# Altium PCB PCB1.PcbDoc
Units mil, origin at the board's own origin, x right, y up, seen from the top; angles counter-clockwise.
Board outline 6000 x 4000 mil, 2 copper layers (Top Layer, Bottom Layer); 133 components, 100 nets, 412 pads, 0 vias.
Unrouted connection lines stored in the file: 282.
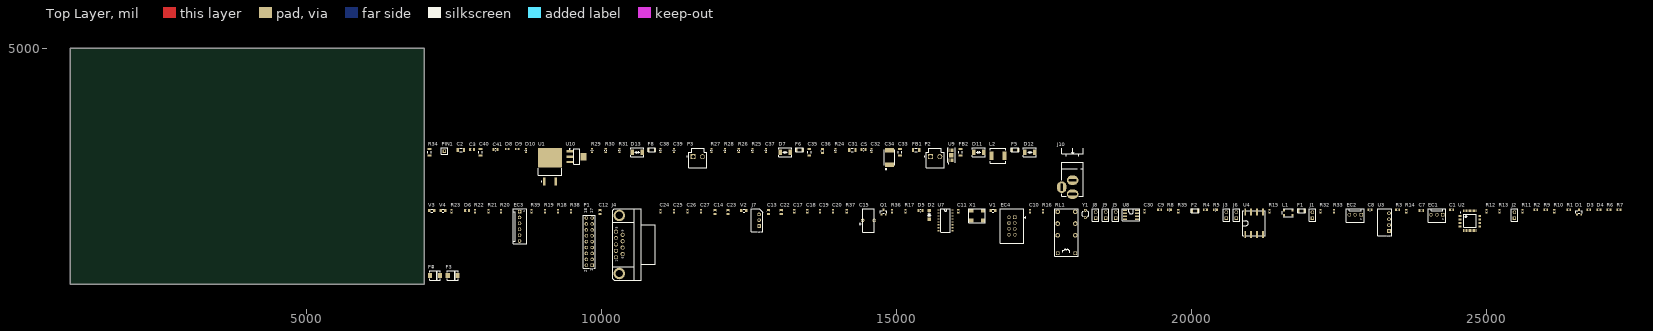
[diagram p0: Top Layer view]
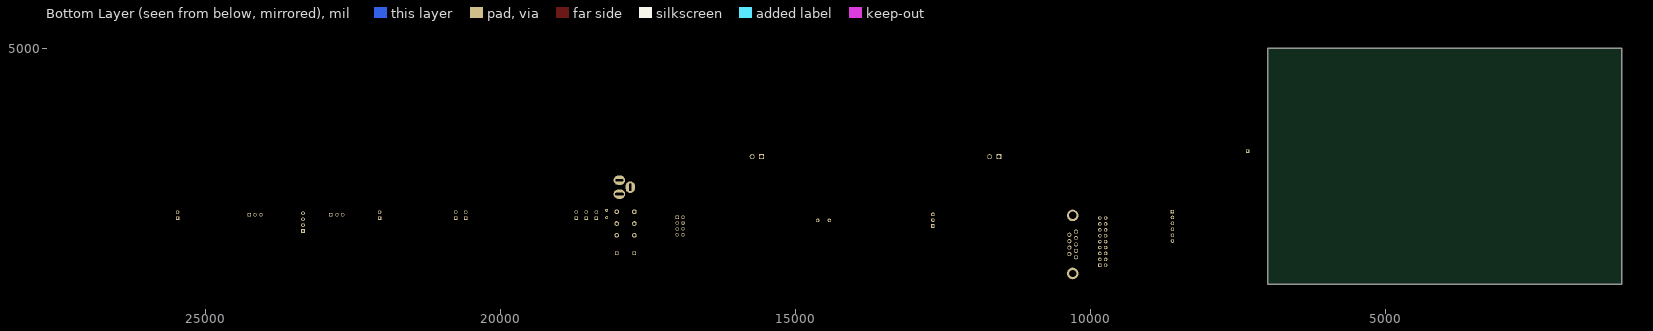
[diagram p1: Bottom Layer view, seen from below]

## Layer stack, top to bottom
Top Solder: solder mask 0.4, Solder Resist, Dk 3.5
Top Layer: signal copper 1.4
Dielectric 1: dielectric 12.6, FR-4, Dk 4.8
Bottom Layer: signal copper 1.4
Bottom Solder: solder mask 0.4, Solder Resist, Dk 3.5

## Board outline
1000,1000 7000,1000 7000,5000 1000,5000

## Design rules (kind name [scope] priority, off if disabled: settings)
Clearance [All] p1: gap=10 ignorepadtopadclearanceinfootprint=FALSE except(0: Arc-Hole Track-Hole SMDPad-Hole THPad-Hole Via-Hole Fill-Hole Poly-Hole Region-Hole Text-Hole)
PolygonConnect [All] p1: connectstyle=Relief reliefconductorwidth=10 reliefentries=4 polygonreliefangle="90 Angle" airgapwidth=10
RoomDefinition power [InComponentClass('power')] p1: confinementstyle=ConfineIn formatcopy=TRUE lockcomponents=FALSE outline 7045,2440 18185,2440 18185,3425 7045,3425
RoomDefinition micro [InComponentClass('micro')] p2: confinementstyle=ConfineIn formatcopy=TRUE lockcomponents=FALSE outline 7045,1060 27330,1060 27330,2395 7045,2395
RoutingVias [All] p1: holewidth=28 width=50 viastyle="Through Hole" minholewidth=28 minwidth=50 maxholewidth=28 maxwidth=50
SolderMaskExpansion [All] p1: expansion=4
Width [All] p1: maxlimit=10 minlimit=10 preferedwidth=10
30 further rules are at their usual default settings.

## Classes and differential pairs
net class EXT_CAN: +5VCAN GND_CAN NetEC1_2 NetEC1_3 NetJ2_1 NetL1_1 NetL1_4 NetR9_2
component class power: C2 C3 C5 C31 C32 C33 C34 C35 C36 C37 C38 C39 C40 C41 D7 D8 D9 D10 D11 D12 D13 F3 F4 F5 F6 F7 F8 FB1 FB2 J10 L2 P2 P3 PIN1 R24 R25 R26 R27 R28 R29 R30 R31 R34 U1 U9 U10
component class micro: C1 C7 C8 C9 C10 C11 C12 C13 C14 C15 C17 C18 C19 C20 C22 C23 C24 C25 C26 C27 C30 D1 D2 D3 D4 D5 D6 EC1 EC2 EC3 EC4 F1 F2 J1 J2 J3 J4 J5 J6 J7 J8 J9 L1 P1 Q1 R1 R2 R3 R4 R5 R6 R7 R8 R9 R10 R11 R12 R13 R14 R15 R16 R17 R18 R19 R20 R21 R22 R23 R32 R33 R35 R36 R37 R38 R39 RL1 U2 U3 U4 U7 U8 V1 V2 V3 V4 X1 Y1

## Components (designator, comment, footprint, x,y, rotation, side; value= is the part's Value field where it differs from the comment)
C1 "100nF" 0603 24415,2265 r0 top value=100pF
C2 "10 uF" 1206 7620,3280 r0 top value=100pF
C3 "10 uF" 0805 7805,3285 r0 top value=100pF
C5 "100 nF" 0805 14445,3285 r0 top value=100pF
C7 "10 uF" 0805 23900,2255 r0 top value=100pF
C8 "1 uF" 0603 23030,2265 r0 top value=100pF
C9 "10pF" 0603 19465,2265 r0 top value=100pF
C10 "10pF" 0603 17265,2240 r90 top value=100pF
C11 "100nF" 0603 16050,2240 r90 top value=100pF
C12 "100 nF" 0805 9980,2230 r90 top value=100pF
C13 "470nF" 0805 12830,2230 r90 top value=100pF
C14 "470nF" 0805 11925,2230 r90 top value=100pF
C15 "0,22F" EECS0HD224V 14430,2085 r0 top
C17 "100nF" 0603 13270,2240 r90 top value=100pF
C18 "100nF" 0603 13490,2240 r90 top value=100pF
C19 "100nF" 0603 13710,2240 r90 top value=100pF
C20 "100nF" 0603 13930,2240 r90 top value=100pF
C22 "470nF" 0805 13050,2230 r90 top value=100pF
C23 "470nF" 0805 12145,2230 r90 top value=100pF
C24 "10 nF" 0603 11000,2240 r90 top value=100pF
C25 "10 nF" 0603 11230,2240 r90 top value=100pF
C26 "10 nF" 0603 11460,2240 r90 top value=100pF
C27 "10 nF" 0603 11690,2240 r90 top value=100pF
C30 "100nF" 0603 19210,2240 r90 top value=100pF
C31 "10uF" 1206 14255,3280 r0 top value=100pF
C32 "100nF" 0603 14580,3270 r90 top value=100pF
C33 "10 uF" 1206 15065,3240 r90 top value=100pF
C34 "330uF" "CAPACITOR TYPE D" 14885,3150 r90 top value=100pF
C35 "10 uF" 1206 13525,3240 r90 top value=100pF
C36 "100 nF" 0805 13750,3260 r90 top value=100pF
C37 "100pF" 0603 12790,3270 r90 top
C38 "22nF" 0603 11005,3270 r90 top value=100pF
C39 "10pF" 0603 11235,3270 r90 top value=100pF
C40 "10 uF" 1206 7955,3240 r90 top value=100pF
C41 "10 uF" 0805 8205,3285 r0 top value=100pF
D1 "BAT54S" SOT23 26575,2225 r0 top
D2 "LL4148" SOD123 15560,2180 r90 top
D3 "LED_G" LED0603G 26740,2265 r0 top
D4 "LED_G" LED0603G 26910,2265 r0 top
D5 "BAT48" 0805 15410,2255 r0 top
D6 "BAT48" 0805 7720,2255 r0 top
D7 "SS26" SMB 13115,3240 r0 top
D8 "LED_G" LED0603G 8405,3295 r0 top
D9 "LED_G" LED0603G 8575,3295 r0 top
D10 "LED_G" LED0603G 8720,3270 r90 top
D11 "SS26" SMB 16395,3240 r0 top
D12 "SS26" SMB 17265,3240 r0 top
D13 "SS26" SMB 10610,3240 r0 top
EC1 "Conexcon-2545-2-03-1_1" CONEXCON-2545-2-03-1 24015,2055 r0 top
EC2 "Conexcon-2545-2-03-1_1" CONEXCON-2545-2-03-1 22630,2055 r0 top
EC3 "Conexcon-2545-2-06-1" CONEXCON-2545-2-06-1 8625,1985 r90 top
EC4 "JST_XAD_8" JST_XADSS_8 16960,1990 r90 top
F1 "1206L110" POLYFUSE_1206L 21870,2250 r0 top
F2 "1206L110" POLYFUSE_1206L 20065,2250 r0 top
F3 "TVS 12V Bidir" DO-214AA 7480,1150 r0 top
F4 "TVS 12V Bidir" DO-214AA 7180,1150 r0 top
F5 "1206L110" POLYFUSE_1206L 17015,3280 r0 top
F6 "1206L110" POLYFUSE_1206L 13360,3280 r0 top
F7 "TVS 12V Bidir" DO-214AA 7180,1150 r0 top
F8 "1206L110" POLYFUSE_1206L 10855,3280 r0 top
FB1 "ILHB1206ER121V" 1206 15335,3280 r0 top
FB2 "ILHB1206ER121V" 1206 16085,3240 r90 top
J1 "JUMPER2" JUMPER_2X1_2.54 22055,2175 r90 top
J2 "JUMPER2" JUMPER_2X1_2.54 25480,2175 r90 top
J3 "JUMPER2" JUMPER_2X1_2.54 20595,2175 r90 top
J4 "A-DS09A/KG-T2" FCI_D09P33E6RV09LF 10305,1185 r90 top
J5 "JUMPER2" JUMPER_2X1_2.54 18720,2175 r90 top
J6 "JUMPER2" JUMPER_2X1_2.54 20765,2175 r90 top
J7 "MKS_19023" MOLEX_MKS_19023 12675,1990 r90 top
J8 "JUMPER2" JUMPER_2X1_2.54 18380,2175 r90 top
J9 "JUMPER2" JUMPER_2X1_2.54 18550,2175 r90 top
J10 "PJ-002AH" POWER_JACK_5.5_2.1MM_NS_v1.1 17990,2530 r0 top
L1 "DLW43SH510XK2" 1812_DLW 21645,2215 r0 top
L2 "33 uH" ELL6SH 16725,3180 r0 top value=10mH
P1 "" HDR2X9 9845,1325 r90 top
P2 "B2P-VH(LF)(SN)" JST-B2P-VH(LF)(SN)_V 15660,3110 r0 top
P3 "B2P-VH(LF)(SN)" JST-B2P-VH(LF)(SN)_V 11635,3110 r0 top
PIN1 "Debug" PIN_Debug 7340,3260 r0 top
Q1 "BSS138-SOT23" "SOT23 - RJ" 14785,2225 r0 top
R1 "4K7" R0603 26400,2265 r0 top value=1K
R2 "330 OHM" R0603 25840,2265 r0 top value=1K
R3 "0 OHM" R0603 23500,2265 r0 top value=1K
R4 "0 OHM" R0603 20240,2265 r0 top value=1K
R5 "0 OHM" R0603 20410,2265 r0 top value=1K
R6 "330 OHM" R0603 27080,2265 r0 top value=1K
R7 "330 OHM" R0603 27250,2265 r0 top value=1K
R8 "0 OHM" R0603 19630,2265 r0 top value=1K
R9 "120 OHM" R0603 26010,2265 r0 top value=1K
R10 "120 OHM" R0603 26155,2240 r90 top value=1K
R11 "0 OHM" R0603 25615,2240 r90 top value=1K
R12 "120 OHM" R0603 25005,2240 r90 top value=1K
R13 "120 OHM" R0603 25225,2240 r90 top value=1K
R14 "0 OHM" R0603 23645,2240 r90 top value=1K
R15 "0 OHM" R0603 21330,2240 r90 top value=1K
R16 "10 K" R0603 17485,2240 r90 top value=1K
R17 "150 OHM" R0603 15155,2240 r90 top value=1K
R18 "100 K" R0603 9265,2240 r90 top value=1K
R19 "0 OHM" R0603 9045,2240 r90 top value=1K
R20 "33 OHM" R0603 8300,2240 r90 top value=1K
R21 "100 K" R0603 8090,2240 r90 top value=1K
R22 "33 OHM" R0603 7860,2240 r90 top value=1K
R23 "1 K" R0603 7460,2240 r90 top value=1K
R24 "4K7" R0603 13970,3270 r90 top value=1K
R25 "390 K" R0603 12560,3270 r90 top value=1K
R26 "47 K" R0603 12330,3270 r90 top value=1K
R27 "390 K" R0603 11865,3270 r90 top value=1K
R28 "10 K" R0603 12095,3270 r90 top value=1K
R29 "4K7" R0603 9845,3270 r90 top value=1K
R30 "1K2" R0603 10075,3270 r90 top value=1K
R31 "330 OHM" R0603 10305,3270 r90 top value=1K
R32 "2K2" R0603 22190,2240 r90 top value=1K
R33 "2K2" R0603 22420,2240 r90 top value=1K
R34 "0 OHM" R1206 7090,3240 r90 top value=1K
R35 "0 OHM" R0603 19780,2240 r90 top value=1K
R36 "33 OHM" R0603 14925,2240 r90 top value=1K
R37 "4K7" R0603 14160,2240 r90 top value=1K
R38 "33 OHM" R0603 9485,2240 r90 top value=1K
R39 "33 OHM" R0603 8815,2240 r90 top value=1K
RL1 "G5V-2-5VDC" RL-OMRON-G5V-2-5VDC 17885,1880 r90 top
U1 "MC7805" D2PAK 9130,2995 r90 top
U2 "STM32F072CBT7" STM-LQFP48_N_3d 24725,2080 r0 top
U3 "MUS-0505" MUS-0505 23280,2055 r90 top
U4 "ISO1050DU" DUB_R_PDSO_G8 21065,2035 r90 top
U7 "TI-MAX3232E" SOIC16 15835,2085 r0 top
U8 "M24C16" SO08 18980,2180 r0 top
U9 "TPS5401DGQ" MSOP10 15935,3190 r0 top
U10 "LM1117IMPX-3.3/NOPB" SOT223_ 9580,3165 r0 top
V1 "VC080526C580" VC080526C580 16640,2250 r0 top
V2 "VC080526C580" VC080526C580 12415,2250 r0 top
V3 "VC080526C580" VC080526C580 7125,2250 r0 top
V4 "VC080526C580" VC080526C580 7315,2250 r0 top
X1 "OSC_24MHZ" Oscillator_7x5 16370,2165 r0 top
Y1 "XTAL" R38 18205,2195 r0 top

## Footprints (in the part's own frame and the unit in brackets; to place one, negate y for a bottom-side part, rotate by r counter-clockwise, add the part's x,y. Pads: shape width x height; smd on the part's side, far side on the other; paste and mask are expansions set on the pad)
0603 [mm] "Chip Resistor, Body 1.6x0.8mm, IPC High Density"
  rect 0.7x0.9 smd: 1(-0.7,0) 2(0.7,0)
  silkscreen extent -0.05,-0.35 0.05,0.35, body extent -0.85,-0.47 0.85,0.47, height 0.6
0805 [mm] "Chip Resistor, Body 2.0x1.3mm, IPC High Density"
  rect 0.85x1.3 smd: 1(-0.85,0) 2(0.85,0)
  silkscreen extent -0.05,-0.55 0.05,0.55, body extent -1.1,-0.67 1.1,0.68, height 0.7
1206 [mm] "Chip Resistor, Body 3.2x1.6mm, IPC High Density"
  rect 0.95x1.7 smd: 1(-1.35,0) 2(1.35,0)
  silkscreen extent -0.5,-0.75 0.5,0.75, body extent -1.67,-0.87 1.67,0.87, height 0.75
1812_DLW [mm]
  rect 0.9x1 smd: 1(-1.9,1.1) 2(1.9,1.1) 3(1.9,-1.1) 4(-1.9,-1.1)
  silkscreen extent -2.8,-1.8 2.2,1.8, body extent -2.25,-1.6 2.25,1.6, height 2.61
"CAPACITOR TYPE D" [mm]
  rect 2x4 smd: 1(-3.15,0) 2(3.15,0)
  rect 1x1 on Mech3: PEGA(0,0)
  silkscreen extent -5.25,-2.3 3.3,2.3, body extent -3.7,-2.22 3.7,2.23, height 3
CONEXCON-2545-2-03-1 [mm]
  rect 1.5x1.5 hole 1: 1(6.35,3.2)
  round 1.5 hole 1: 2(3.81,3.2) 3(1.27,3.2)
  silkscreen extent 0,0 7.62,5.8, body extent 0,0 7.62,5.8, height 11.71
CONEXCON-2545-2-06-1 [mm]
  rect 1.5x1.5 hole 1: 1(6.35,0.3)
  round 1.5 hole 1: 2(3.81,0.3) 3(1.27,0.3) 4(-1.27,0.3) 5(-3.81,0.3) 6(-6.35,0.3)
  silkscreen extent -7.62,-2.9 7.62,2.9
D2PAK [mm] "DPAK, 3-Leads, Body 10.24x9.35mm, Pitch 2.54mm"
  rect 3.504x1.016 smd: 1(-6.313,2.54) 3(-6.313,-2.54)
  rect 8.38x10.49 smd: 4(3.9,0)
  silkscreen extent -6.44,-5.12 -0.69,5.12, body extent -6.11,-5.13 8.09,5.13, height 4.75
DO-214AA [mm] "DO-214-AA/SMB; 2 C-Bend Leads; Body 5.3 x 3.6 mm, inc. leads (LxW)"
  rect 1.8x2.3 smd: 1(-2.108,0) 2(2.108,0)
  silkscreen extent -2.35,-1.97 2.35,1.97, body extent -2.79,-1.97 2.79,1.97, height 2.65
DUB_R_PDSO_G8 [mm]
  rect 3x0.8 smd: 1(-4.8,3.81) 2(-4.8,1.27) 3(-4.8,-1.27) 4(-4.8,-3.81) 5(4.8,-3.81) 6(4.8,-1.27) 7(4.8,1.27) 8(4.8,3.81)
  silkscreen extent -5.35,-4.77 5.35,4.77, body extent -5.25,-4.75 5.25,4.75, height 4.18
EECS0HD224V [mm]
  round 1.5 hole 0.85: 1(0,0) 2(5,0)
  silkscreen extent -1.5,-5 5,5
ELL6SH [mm] "Precision Wire Wound Inductor, 2-Leads, Body 6,00x6,00mm, IPC Medium Density"
  rect 1.7x3.8 smd: 1(-2.85,0) 2(2.85,0)
  silkscreen extent -3.25,-3.25 3.25,3.25, body extent -3.25,-3.25 3.25,3.25, height 3
FCI_D09P33E6RV09LF [mil]
  round 70 hole 43.31: 1(274,56) 2(383,56) 3(492,56) 4(601,56) 5(710,56) 6(329,-56) 7(438,-56) 8(547,-56) 9(656,-56)
  round 196.85 hole 125.98: 10(0,0) 11(984,0)
  silkscreen extent -114,-610 1098,110, body extent -113,-620 1097,135, height 495
HDR2X9 [mm] "Connector; Header; 9x2 Position"
  rect 1.5x1.5 hole 0.9: 1(0,0)
  round 1.5 hole 0.9: 2(0,2.54) 3(2.54,0) 4(2.54,2.54) 5(5.08,0) 6(5.08,2.54) 7(7.62,0) 8(7.62,2.54) 9(10.16,0) 10(10.16,2.54) 11(12.7,0) 12(12.7,2.54) 13(15.24,0) 14(15.24,2.54) 15(17.78,0) 16(17.78,2.54) 17(20.32,0) 18(20.32,2.54)
  silkscreen extent -1.27,-1.27 21.59,3.81
JST-B2P-VH(LF)(SN)_V [mm] "THD, 2-Leads, Body 8.5x7.86mm, Pitch 3.96mm"
  rect 2.15x2.15 hole 1.65: 1(-1.98,1.4)
  round 2.15 hole 1.65: 2(1.98,1.4)
  silkscreen extent -4.7,-3.4 3.93,5.1, body extent -3.93,-3.2 3.93,5.3, height 10.9
JST_XADSS_8 [mm]
  rect 1.5x1.5 hole 1: 1(3.75,-1.25)
  round 1.5 hole 1: 2(3.75,1.25) 3(1.25,-1.25) 4(1.27,1.27) 5(-1.25,-1.25) 6(-1.25,1.25) 7(-3.75,-1.25) 8(-3.75,1.25)
  silkscreen extent -7.5,-5.87 7.5,5.05, body extent -7.5,-5.05 7.5,5.05, height 10.1
JUMPER_2X1_2.54 [mm]
  rect 1.5x1.5 hole 1: 1(-1.27,0)
  round 1.5 hole 1: 2(1.27,0)
  silkscreen extent -2.7,-1.4 2.7,1.4, body extent -2.54,-1.27 2.54,1.27, height 8.51
LED0603G [mm] "LED 0603 GREEN"
  rect 0.7x0.9 smd: 1(-0.7,0) 2(0.7,0)
  silkscreen extent -0.05,-0.35 0.05,0.35, body extent -0.8,-0.4 0.8,0.4, height 0.61
MOLEX_MKS_19023 [mm] "Connector_3x1_0.7mm"
  rect 1.6x1.6 hole 0.9: 1(0,0)
  round 1.6 hole 0.9: 2(2.5,0) 3(5,0)
  silkscreen extent -2.45,-1.52 7.45,3.38, body extent -2.5,-1.85 7.5,3.05, height 5.91
MSOP10 [mm]
  rect 0.3x1.45 smd: 1(-1,-2.2) 2(-0.5,-2.2) 3(0,-2.2) 4(0.5,-2.2) 5(1,-2.2) 6(1,2.2) 7(0.5,2.2) 8(0,2.2) 9(-0.5,2.2) 10(-1,2.2)
  rect 1.89x1.83 smd: 11(0,0)
  silkscreen extent -1.55,-3.61 1.55,3.13, body extent -1.55,-2.52 1.55,2.52, height 1.1
MUS-0505 [mm]
  rect 1.6x1.6 hole 1: 1(-3.81,-1.85)
  round 1.6 hole 1: 2(-1.27,-1.85) 3(1.27,-1.85) 4(3.81,-1.85)
  silkscreen extent -5.8,-3.05 5.8,3.05, body extent -5.75,-3.02 5.75,3.03, height 7.71
Oscillator_7x5 [mm]
  rect 1.8x1.6 smd: 1(-2.54,-2.1) 2(2.54,-2.1) 3(2.54,2.1) 4(-2.54,2.1)
  silkscreen extent -3.6,-3 3.6,3, body extent -3.5,-2.5 3.5,2.5, height 1.37
PIN_Debug [mm]
  rect 1.5x1.5 hole 1: 1(0,0)
  silkscreen extent -1.4,-1.4 1.4,1.4, body extent -1.27,-1.22 1.27,1.22, height 10.3
POLYFUSE_1206L [mm]
  rect 1x1.8 smd: 1(-1.4,0) 2(1.4,0)
  silkscreen extent -1.6,-0.83 1.6,0.83, body extent -1.6,-0.83 1.6,0.83, height 1.43
POWER_JACK_5.5_2.1MM_NS_v1.1 [mm]
  oval 5x4 hole 1 slot 3.7 at 0 deg: 1(0,0)
  oval 5x4 hole 1 slot 3.2 at 0 deg: 2(0,6)
  oval 4x5 hole 1 slot 3.2 at 90 deg: 3(-4.7,3)
  silkscreen extent -4.65,-0.85 4.65,19.85, body extent -4.9,-0.7 4.5,13.7, height 11.02
R38 [mm] "Crystal, Thru-Hole; 2 Leads; Body 3.1 x 8.2 mm (Dia.xH)"
  round 1.3 hole 0.7: 1(0,1.55) 2(0,-1.55)
  silkscreen extent -1.55,-1.19 1.55,1.17
R0603 [mm] "Chip Resistor, Body 1.6x0.8mm, IPC High Density"
  rect 0.7x0.9 smd: 1(-0.7,0) 2(0.7,0)
  silkscreen extent -0.05,-0.35 0.05,0.35, body extent -0.85,-0.47 0.85,0.47, height 0.6
R1206 [mm] "Chip Resistor, Body 3.2x1.6mm, IPC High Density"
  rect 0.95x1.7 smd: 1(-1.35,0) 2(1.35,0)
  silkscreen extent -0.5,-0.75 0.5,0.75, body extent -1.67,-0.87 1.67,0.87, height 0.75
RL-OMRON-G5V-2-5VDC [mm]
  rect 1.5x1.5 hole 1.1: 1(-8.85,3.81) 16(-8.85,-3.81)
  round 2 hole 1.1: 4(-1.23,3.81) 6(3.85,3.81) 8(8.93,3.81) 9(8.93,-3.81) 11(3.85,-3.81) 13(-1.23,-3.81)
  silkscreen extent -10.25,-5.05 10.25,5.05, body extent -10.2,-5 10.2,5, height 11.43
SMB [mm]
  rect 1.52x2.3 smd: 1(-2.135,0) 2(2.135,0)
  round 0.8 on Mech3: PEGA(0,0)
  silkscreen extent -2.8,-1.9 2.8,1.9, body extent -2.79,-1.97 2.79,1.97, height 2.65
SO08 [mil]
  rect 64x26 smd: 1(-102.5,75) 2(-102.5,25) 3(-102.5,-25) 4(-102.5,-75) 5(102.5,-75) 6(102.5,-25) 7(102.5,25) 8(102.5,75)
  silkscreen extent -150,-105 150,105, body extent -118,-96 118,96, height 69
SOD123 [mm]
  rect 1.4x1.4 smd: 1(-1.9,0) 2(1.9,0)
  rect 1x1 on Mech3: PEGA(0,0)
  silkscreen extent -0.89,-0.64 0.89,0.64, body extent -1.95,-0.9 1.95,0.9, height 1.18
SOIC16 [mm]
  rect 1x0.5 smd: 1(-3,4.445) 2(-3,3.175) 3(-3,1.905) 4(-3,0.635) 5(-3,-0.635) 6(-3,-1.905) 7(-3,-3.175) 8(-3,-4.445) 9(3,-4.445) 10(3,-3.175) 11(3,-1.905) 12(3,-0.635) 13(3,0.635) 14(3,1.905) 15(3,3.175) 16(3,4.445)
  silkscreen extent -2,-5 2,5, body extent -3,-4.95 3,4.95, height 1.4
SOT23 [mm]
  rect 0.8x1 smd: 1(-0.95,-1) 2(0.95,-1) 3(0,1)
  round 0.8 on Mech3: PEGA(-1.397,0) PEGA(1.397,0)
  silkscreen extent -1.4,-0.51 1.4,0.64, body extent -1.5,-1.25 1.5,1.25, height 1.11
"SOT23 - RJ" [mm]
  rect 0.8x1 smd: D(0,1) G(-0.95,-1) S(0.95,-1)
  round 0.8 on Mech3: PEGA(-1.397,0) PEGA(1.397,0)
  silkscreen extent -1.4,-0.51 1.4,0.64, body extent -1.5,-1.25 1.5,1.25, height 1.11
SOT223_ [mm] "SOT223, 4-Leads, Body 6.5x3.5mm, Pitch 2.3mm, Lead Span 7mm, IPC Low Density"
  rect 2.7x1 smd: 1(-2.95,2.3) 2(-2.95,0) 3(-2.95,-2.3)
  rect 2.7x3.3 smd: 4(2.95,0)
  silkscreen extent -3.07,-3.35 1.3,3.47, body extent -3.48,-3.25 3.48,3.25, height 1.65
STM-LQFP48_N_3d [mm] "QFP, 48-Leads, Body 7x7mm, Pitch 0.5mm, IPC Medium Density"
  rect 1.2x0.3 smd: 1(-4.25,2.75) 2(-4.25,2.25) 3(-4.25,1.75) 4(-4.25,1.25) 5(-4.25,0.75) 6(-4.25,0.25) 7(-4.25,-0.25) 8(-4.25,-0.75) 9(-4.25,-1.25) 10(-4.25,-1.75) 11(-4.25,-2.25) 12(-4.25,-2.75) 25(4.25,-2.75) 26(4.25,-2.25) 27(4.25,-1.75) 28(4.25,-1.25) 29(4.25,-0.75) 30(4.25,-0.25) 31(4.25,0.25) 32(4.25,0.75) 33(4.25,1.25) 34(4.25,1.75) 35(4.25,2.25) 36(4.25,2.75)
  rect 0.3x1.2 smd: 13(-2.75,-4.25) 14(-2.25,-4.25) 15(-1.75,-4.25) 16(-1.25,-4.25) 17(-0.75,-4.25) 18(-0.25,-4.25) 19(0.25,-4.25) 20(0.75,-4.25) 21(1.25,-4.25) 22(1.75,-4.25) 23(2.25,-4.25) 24(2.75,-4.25) 37(2.75,4.25) 38(2.25,4.25) 39(1.75,4.25) 40(1.25,4.25) 41(0.75,4.25) 42(0.25,4.25) 43(-0.25,4.25) 44(-0.75,4.25) 45(-1.25,4.25) 46(-1.75,4.25) 47(-2.25,4.25) 48(-2.75,4.25)
  silkscreen extent -4.17,-2.75 2.75,3.57, body extent -4.57,-4.57 4.57,4.57, height 1.62
VC080526C580 [mm] "Chip Capacitor, 2-Leads, Body 2,00x1,25mm, IPC Medium Density"
  rect 1.02x1.27 smd: 1(-1.02,0) 2(1.02,0)
  silkscreen extent -0.32,-0.63 0.32,0.63, body extent -1,-0.62 1,0.63, height 1.25

## Part data
C1 C11 C17 C18 C19 C20 C30 C32: library part 6003071, "Capacitor", Codigo=6003071, DescripcionArticulo="COND. CERAMICO SMD 0603 100 NF X7R 50V 10%", LatestRevisionDate=17-Jul-2002, LatestRevisionNote="Re-released for DXP Platform.", PackageDescription="Radial Cap, Thru-Hole; 2 Leads; 0.3 in Pin Spacing", PackageReference=RAD-0.3, Published=8-Jun-2000, Publisher="Altium Limited", tipo=condensador, valor=100nF
C2 C31 C33 C35 C40: library part 6003031, "Capacitor", Codigo=6003031, DescripcionArticulo="COND. CERAMICO SMD 1206 10 UF X5R 35V 10%", LatestRevisionDate=17-Jul-2002, LatestRevisionNote="Re-released for DXP Platform.", PackageDescription="Radial Cap, Thru-Hole; 2 Leads; 0.3 in Pin Spacing", PackageReference=RAD-0.3, Published=8-Jun-2000, Publisher="Altium Limited", tipo=condensador
  C2 C33 C35 C40: valor="10 uF"
  C31: valor=10uF
C3 C7 C41: library part 6003114, "Capacitor", Codigo=6003114, DescripcionArticulo="COND. CERAMICO SMD 0805 10 UF 6.3V -10V", LatestRevisionDate=17-Jul-2002, LatestRevisionNote="Re-released for DXP Platform.", PackageDescription="Radial Cap, Thru-Hole; 2 Leads; 0.3 in Pin Spacing", PackageReference=RAD-0.3, Published=8-Jun-2000, Publisher="Altium Limited", tipo=condensador, valor="10 uF"
C5 C12 C36: library part 6003010, "Capacitor", Codigo=6003010, DescripcionArticulo="COND. CERAMICO SMD 0805 100 NF 50V 10%", LatestRevisionDate=17-Jul-2002, LatestRevisionNote="Re-released for DXP Platform.", PackageDescription="Radial Cap, Thru-Hole; 2 Leads; 0.3 in Pin Spacing", PackageReference=RAD-0.3, Published=8-Jun-2000, Publisher="Altium Limited", tipo=condensador, valor="100 nF"
C8: library part 6003088, "Capacitor", Codigo=6003088, DescripcionArticulo="COND. CERAMICO SMD 0603 1 UF X5R 10V 10%", LatestRevisionDate=17-Jul-2002, LatestRevisionNote="Re-released for DXP Platform.", PackageDescription="Radial Cap, Thru-Hole; 2 Leads; 0.3 in Pin Spacing", PackageReference=RAD-0.3, Published=8-Jun-2000, Publisher="Altium Limited", tipo=condensador, valor="1 uF"
C9 C10 C39: library part 6003068, "Capacitor", Codigo=6003068, DescripcionArticulo="COND. CERAMICO SMD 0603 10 PF X7R 50V", LatestRevisionDate=17-Jul-2002, LatestRevisionNote="Re-released for DXP Platform.", PackageDescription="Radial Cap, Thru-Hole; 2 Leads; 0.3 in Pin Spacing", PackageReference=RAD-0.3, Published=8-Jun-2000, Publisher="Altium Limited", tipo=condensador, valor=10pF
C13 C14 C22 C23: library part 6003055, "Capacitor", Codigo=6003055, DescripcionArticulo="COND. CERAMICO SMD 0805 470NF X7R 50V 10%", LatestRevisionDate=17-Jul-2002, LatestRevisionNote="Re-released for DXP Platform.", PackageDescription="Radial Cap, Thru-Hole; 2 Leads; 0.3 in Pin Spacing", PackageReference=RAD-0.3, Published=8-Jun-2000, Publisher="Altium Limited", tipo=condensador, valor=470nF
C15: library part 3023047, "Polarized Capacitor (Axial)", Codigo=3023047, DescripcionArticulo="CONDENSADOR EECS0HD224V 0,22F 5,5 V", LatestRevisionDate=17-Jul-2002, LatestRevisionNote="Re-released for DXP Platform.", PackageDescription="Polarized Capacitor; 2 Leads", PackageReference=POLAR0.8, Published=8-Jun-2000, Publisher="Altium Limited", tipo=condensador, valor=0,22F
C24 C25 C26 C27: library part 6003067, "Capacitor", Codigo=6003067, DescripcionArticulo="COND. CERAMICO SMD 0603 10 NF X7R 50V 10%", LatestRevisionDate=17-Jul-2002, LatestRevisionNote="Re-released for DXP Platform.", PackageDescription="Radial Cap, Thru-Hole; 2 Leads; 0.3 in Pin Spacing", PackageReference=RAD-0.3, Published=8-Jun-2000, Publisher="Altium Limited", tipo=condensador, valor="10 nF"
C34: library part 6010017, "Polarized Capacitor (Axial)", Codigo=6010017, DescripcionArticulo="COND. ELEC. SMD 330 UF 6.3V CAJA D", LatestRevisionDate=17-Jul-2002, LatestRevisionNote="Re-released for DXP Platform.", PackageDescription="Polarized Capacitor; 2 Leads", PackageReference=POLAR0.8, Published=8-Jun-2000, Publisher="Altium Limited", tipo=condensador, valor=330uF
C37: library part 6003092, "Capacitor", Codigo=6003092, DescripcionArticulo="COND. CERAMICO SMD 0603 100 PF X5R 50V 10%", LatestRevisionDate=17-Jul-2002, LatestRevisionNote="Re-released for DXP Platform.", PackageDescription="Radial Cap, Thru-Hole; 2 Leads; 0.3 in Pin Spacing", PackageReference=RAD-0.3, Published=8-Jun-2000, Publisher="Altium Limited", tipo=condensador, valor=100pF
C38: library part 6003126, "Capacitor", Codigo=6003126, DescripcionArticulo="COND. CERAMICO SMD 0603 22NF 10% 50V X5R", LatestRevisionDate=17-Jul-2002, LatestRevisionNote="Re-released for DXP Platform.", PackageDescription="Radial Cap, Thru-Hole; 2 Leads; 0.3 in Pin Spacing", PackageReference=RAD-0.3, Published=8-Jun-2000, Publisher="Altium Limited", tipo=condensador, valor=22nF
D1: library part 6006051, "High Current Density Surface Mount Schottky Rectifier", Codigo=6006051, DescripcionArticulo="DIODO SMD BAT54S Schottky 30V,200mA VISHAY", Escandallo=Sí, tipo=diodo, valor=BAT54S
D2: library part LL4148_(06006001), "DIODE SWITCH,100V,150MA,SOD123", Sallen Ref=06006001
D3 D4 D8 D9 D10: library part 6006022, "Typical RED, GREEN, YELLOW, AMBER GaAs LED", Codigo=6006022, DescripcionArticulo="DIODO LED VERDE SML-LX0603GW 1.6X0.8X0.6", Escandallo=Sí, LatestRevisionDate=17-Jul-2002, LatestRevisionNote="Re-released for DXP Platform.", PackageDescription="SM LED; 2 Flat Leads", PackageReference=3.2X1.6X1.1, PackageVersion=Feb-2002, Published=8-Jun-2000, Publisher="Altium Limited", tipo=diodo, valor=LED_G
D5 D6: library part 6006002, "Schottky Diode", Code_JEDEC=DO-214-AA, Codigo=6006002, DescripcionArticulo="DIODO SMD TMMBAT48 SCHORTKY", Escandallo=Sí, LatestRevisionDate=17-Jul-2002, LatestRevisionNote="Re-released for DXP Platform.", PackageDescription="DO-214-AA/SMB; 2 C-Bend Leads; Body 5.3 x 3.6 mm, inc. leads (LxW)", PackageReference=SMB, Published=8-Jun-2000, Publisher="Altium Limited", tipo=diodo, valor=BAT48
D7 D11 D12 D13: library part 6006033, "Schottky Diode", Code_JEDEC=DO-214-AA, Codigo=6006033, Descripcion2Articulo=/ONsemi/Vishay/Farchild/TaiwanS, DescripcionArticulo="DIODO SS26 SCHOTTKY CASE: SMB  2AMP 60V", Escandallo=Sí, LatestRevisionDate=17-Jul-2002, LatestRevisionNote="Re-released for DXP Platform.", PackageDescription="DO-214-AA/SMB; 2 C-Bend Leads; Body 5.3 x 3.6 mm, inc. leads (LxW)", PackageReference=SMB, Published=8-Jun-2000, Publisher="Altium Limited", tipo=diodo, valor=SS26
EC1 EC2: library part 5100106, "2.54mm pitch Terminal Block 3P", Part Number=Conexcon-2545-2-03-1, Codigo=5100106, DescripcionArticulo="CON.RECTO MACHO 3P SERIE 2545 PASO 2.54", Escandallo=Sí, Sallen Ref=05100106, tipo=conector, valor=RECTO3P
EC3: library part 5100107, "2.54mm pitch Terminal Block 6P", Codigo=5100107, DescripcionArticulo="CON.RECTO MACHO 6P SERIE 2545 PASO 2.54", Escandallo=Sí, Part Number=Conexcon-2545-2-06-1, Sallen Ref=05100107, tipo=conector, valor=RECTO6P
EC4: library part Conn_JST_XADSS_8_vias, "Conector 8(2x4) vias (3A)", Part Number=-, Sallen Ref=05100217
F1 F2 F5 F6 F8: library part POLYFUSE_1206L050/24
F3 F4 F7: library part SMBJ12CA, "TVS 12V 600W Bidir SMD", Fabricante=Littelfuse, Montaje=-, Referencia=SMBJ12CA
FB1 FB2: library part 4039004, "Chip Ferrite Bead for Power Lines, 33 Ohm, 6000 mA, , -55 to 125 degC, 3.2 x 1.6 x 1.3 mm SMD, Tape and Reel", Codigo=4039004, DescripcionArticulo="FERRITA ILHB1206ER121V 6A-0.02", Escandallo=Sí, tipo=ferrita, valor=ILHB1206ER121V
J1 J2 J3 J5 J6 J8 J9: library part 5190140, "Jumper 2pin P=2.54mm", Part Number=-, Codigo=5190140, DescripcionArticulo="JUMPER PARA POSTE AISLADO- PASO: 2.54MM (CO 3005)", Escandallo=Sí, Sallen Ref=05190140, tipo=conector, valor=JMP
J4: library part 5110018, "DB9 CONN RIGHT ANGLE", Part Number="ASSMANN A-DS09A/KG-T2", Part Number Aux="FCI D09P33E6RV09LF", ATLStockNo1=4500.xxxx, Codigo=5110018, DescripcionArticulo="CONEC. DB9  ACOD.  C.I REF: CO 2359 M", Escandallo=Sí, Sallen Ref=05110018, tipo=conector, valor=A-DS09A/KG-T2_FCI
J7: library part 5100079, "Molex_MKS_19023", Codigo=5100079, DescripcionArticulo="CONEC.MACHO 3P STOCKO MKS19023", Escandallo=Sí, Sallen Ref=05100079, valor=MOLEX_MKS_19023
J10: library part PJ-002AH_v1.1, "CONN PWR JACK 2.1X5.5MM HIGH CUR", Color=Black, Current Rating=5A, Manufacturer="CUI Inc", Operating Temperature="-25°C ~ 85°C", Supplier Part Number=CP-002AH-ND, Voltage - Rated=24VDC, .Checked PCB=MM, .Checked SCH=MM, .Creator=MM, Category="Connectors, Interconnects", ComponentLink1Description=http://products.cui.com/GetSpecForDigiKey.aspx?MFGNum=PJ-002AH, ComponentLink1URL=http://products.cui.com/GetSpecForDigiKey.aspx?MFGNum=PJ-002AH, Connector Type=Jack, Contact Material="Copper Alloy", Contact Material - Plating=Nickel, Family="Barrel - Power", Features=-, Gender=Male, Housing Color=Black, Housing Material=Thermoplastic, Internal Switch(s)="Single Switch, Normally Closed", Manufacturer Part Number=PJ-002AH, Mating connector="2.1mm ID, 5.5mm OD", Mounting Type="Through Hole, Right Angle", Number of Positions/Contacts="2 Conductors, 3 Contacts", Plug/Mating Plug Diameter="2.1mm ID, 5.5mm OD", Price 1k [$]=0.23625, Pricing 1="1=1.01, 10=0.704, 100=0.4724, 500=0.3819, 1000=0.3417, 2500=0.27135 (USD)", RoHS="RoHS Compliant", Shielding=Unshielded, Stock 1=138933, Supplier=Digikey, Supplier 1=Digi-Key, Supplier Part Number 1=CP-002AH-ND, Termination="Solder Eyelet(s)"
L1: library part 6012027, "Bobina Common mode 51uH 230mA 1.0Ohm SMD 1812 /Murata", Codigo=6012027, Descripcion2Articulo="DLW43SH510XK2L MURATA", DescripcionArticulo="DLW43SH510XK2L SMD Common Mode Choke 1812", Escandallo=Sí, Mfg1_PN=DLW43SH510XK2, Mfg2=Murata, Sallen Ref=06012027, tipo=bobina, valor=DLW43SH510XK2L
L2: library part 6012028, "Magnetic-Core Inductor", Codigo=6012028, DescripcionArticulo="INDUCTOR 33UH 0.6A 6x6mm ELL6SH330M", Escandallo=Sí, LatestRevisionDate=17-Jul-2002, LatestRevisionNote="Re-released for DXP Platform.", PackageDescription="Axial Device, Thru-Hole; 2 Leads; 0.9 in Pin Spacing", PackageReference=AXIAL-0.9, Published=24-Mar-1999, Publisher="Altium Limited", tipo=bobina, valor="33 uH"
P1: library part "Header 9X2", "Header, 9-Pin, Dual row", LatestRevisionDate=17-Jul-2002, LatestRevisionNote="Re-released for DXP Platform.", Publisher="Altium Limited"
P2 P3: library part 5110017, "Male Header, Pitch 3.96 mm, 1 x 2 Position, Height 10.9 mm, Tail Length 3.7 mm, -25 to 85 degC, RoHS, Bulk", Capacitance="27 pF", Case/Package=0603, Case Code (Metric)=1608, Max Operating Temperature=125degC, Min Operating Temperature=-55degC, Package Quantity=4000, Resistance="100000000000 Ohm", Tolerance=5%, Type (Capacitors)=C0G, Voltage Rating="50 V", Case Code (Imperial)=0603, Codigo=5110017, ComponentLink1Description="Manufacturer URL", ComponentLink1URL=http://www.jst.com/home2.html, ComponentLink2Description=Datasheet, ComponentLink2URL=http://www.jst-mfg.com/product/pdf/eng/eVH.pdf, DatasheetVersion=May-16, DescripcionArticulo="CONEC. MACHO RECTO 2 VIA C.I PASO 3,96MM", Escandallo=Sí, Height="0.8 mm", Length="1.6 mm", Mount="Surface Mount", PackageDescription="Male Header, Pitch 3.96 mm, 1 x 2 Position, Height 10.9 mm, Tail Length 3.7 mm", PackageReference=B2P-VH(LF)(SN), Packaging="Tape and Reel", Pins=2, Radiation Hardening=No, REACH SVHC="No SVHC", RoHSCompliant=True, tipo=conector, valor=B2P-VH(LF)(SN), Voltage Rating (DC)="50 V", Width="0.8 mm"
PIN1: library part Pin_Debug, "PIN DE NET PUNTUAL /Pin Strip", Sallen Ref=05190126
Q1: "N-Channel Logic Level Enhancement Mode Field Effect Transistor", Part Number=BSS138-SOT23, Sallen Ref=06004021
R1 R24 R29 R37: library part 6005096, "Resistor", Codigo=6005096, DescripcionArticulo="RESISTENCIA SMD 0603 4K7, 1% 0.1W", LatestRevisionDate=17-Jul-2002, LatestRevisionNote="Re-released for DXP Platform.", PackageDescription="Axial Device, Thru-Hole; 2 Leads; 0.3 in Pin Spacing", PackageReference=AXIAL-0.3, Published=8-Jun-2000, Publisher="Altium Limited", tipo=resistencia, valor=4K7
R2 R6 R7 R31: library part 6005080, "Resistor", Codigo=6005080, DescripcionArticulo="RESISTENCIA SMD 0603 330 OHM, 1% 0.1W", LatestRevisionDate=17-Jul-2002, LatestRevisionNote="Re-released for DXP Platform.", PackageDescription="Axial Device, Thru-Hole; 2 Leads; 0.3 in Pin Spacing", PackageReference=AXIAL-0.3, Published=8-Jun-2000, Publisher="Altium Limited", tipo=resistencia, valor="330 OHM"
R3 R4 R5 R8 R11 R14 R15 R19 R35: library part 6005124, "Resistor", Codigo=6005124, DescripcionArticulo="RESISTENCIA SMD 0603 0 OHM, 1% 0.1W", LatestRevisionDate=17-Jul-2002, LatestRevisionNote="Re-released for DXP Platform.", PackageDescription="Axial Device, Thru-Hole; 2 Leads; 0.3 in Pin Spacing", PackageReference=AXIAL-0.3, Published=8-Jun-2000, Publisher="Altium Limited", tipo=resistencia, valor="0 OHM"
R9 R10 R12 R13: library part 6005086, "Resistor", Codigo=6005086, DescripcionArticulo="RESISTENCIA SMD 0603 120 OHM, 1% 0.1W", LatestRevisionDate=17-Jul-2002, LatestRevisionNote="Re-released for DXP Platform.", PackageDescription="Axial Device, Thru-Hole; 2 Leads; 0.3 in Pin Spacing", PackageReference=AXIAL-0.3, Published=8-Jun-2000, Publisher="Altium Limited", tipo=resistencia, valor="120 OHM"
R16 R28: library part 6005102, "Resistor", Codigo=6005102, DescripcionArticulo="RESISTENCIA SMD 0603 10 K, 1%", LatestRevisionDate=17-Jul-2002, LatestRevisionNote="Re-released for DXP Platform.", PackageDescription="Axial Device, Thru-Hole; 2 Leads; 0.3 in Pin Spacing", PackageReference=AXIAL-0.3, Published=8-Jun-2000, Publisher="Altium Limited", tipo=resistencia, valor="10 K"
R17: library part 6005087, "Resistor", Codigo=6005087, DescripcionArticulo="RESISTENCIA SMD 0603 150 OHM, 1% 0.1W", LatestRevisionDate=17-Jul-2002, LatestRevisionNote="Re-released for DXP Platform.", PackageDescription="Axial Device, Thru-Hole; 2 Leads; 0.3 in Pin Spacing", PackageReference=AXIAL-0.3, Published=8-Jun-2000, Publisher="Altium Limited", tipo=resistencia, valor="150 OHM"
R18 R21: library part 6005075, "Resistor", Codigo=6005075, DescripcionArticulo="RESISTENCIA SMD 0603 100 K, 1%", LatestRevisionDate=17-Jul-2002, LatestRevisionNote="Re-released for DXP Platform.", PackageDescription="Axial Device, Thru-Hole; 2 Leads; 0.3 in Pin Spacing", PackageReference=AXIAL-0.3, Published=8-Jun-2000, Publisher="Altium Limited", tipo=resistencia, valor="100 K"
R20 R22 R36 R38 R39: library part 6005074, "Resistor", Codigo=6005074, DescripcionArticulo="RESISTENCIA SMD 0603 33 OHM, 1% 0.1W", LatestRevisionDate=17-Jul-2002, LatestRevisionNote="Re-released for DXP Platform.", PackageDescription="Axial Device, Thru-Hole; 2 Leads; 0.3 in Pin Spacing", PackageReference=AXIAL-0.3, Published=8-Jun-2000, Publisher="Altium Limited", tipo=resistencia, valor="33 OHM"
R23: library part 6005111, "Resistor", Codigo=6005111, DescripcionArticulo="RESISTENCIA SMD 0603 1 K, 1% 0.1W", LatestRevisionDate=17-Jul-2002, LatestRevisionNote="Re-released for DXP Platform.", PackageDescription="Axial Device, Thru-Hole; 2 Leads; 0.3 in Pin Spacing", PackageReference=AXIAL-0.3, Published=8-Jun-2000, Publisher="Altium Limited", tipo=resistencia, valor="1 K"
R25 R27: library part 6005091, "Resistor", Codigo=6005091, DescripcionArticulo="RESISTENCIA SMD 0603 390 K, 1%", LatestRevisionDate=17-Jul-2002, LatestRevisionNote="Re-released for DXP Platform.", PackageDescription="Axial Device, Thru-Hole; 2 Leads; 0.3 in Pin Spacing", PackageReference=AXIAL-0.3, Published=8-Jun-2000, Publisher="Altium Limited", tipo=resistencia, valor="390 K"
R26: library part 6005077, "Resistor", Codigo=6005077, DescripcionArticulo="RESISTENCIA SMD 0603 47 K, 1% 0.1W", LatestRevisionDate=17-Jul-2002, LatestRevisionNote="Re-released for DXP Platform.", PackageDescription="Axial Device, Thru-Hole; 2 Leads; 0.3 in Pin Spacing", PackageReference=AXIAL-0.3, Published=8-Jun-2000, Publisher="Altium Limited", tipo=resistencia, valor="47 K"
R30: library part 6005113, "Resistor", Codigo=6005113, DescripcionArticulo="RESISTENCIA SMD 0603 1K2, 1%  0.1W", LatestRevisionDate=17-Jul-2002, LatestRevisionNote="Re-released for DXP Platform.", PackageDescription="Axial Device, Thru-Hole; 2 Leads; 0.3 in Pin Spacing", PackageReference=AXIAL-0.3, Published=8-Jun-2000, Publisher="Altium Limited", tipo=resistencia, valor=1K2
R32 R33: library part 6005073, "Resistor", Codigo=6005073, DescripcionArticulo="RESISTENCIA SMD 0603 2K2, 1% 0.1W", LatestRevisionDate=17-Jul-2002, LatestRevisionNote="Re-released for DXP Platform.", PackageDescription="Axial Device, Thru-Hole; 2 Leads; 0.3 in Pin Spacing", PackageReference=AXIAL-0.3, Published=8-Jun-2000, Publisher="Altium Limited", tipo=resistencia, valor=2K2
R34: library part 6005142, "Resistor", Codigo=6005142, DescripcionArticulo="RESISTENCIA SMD 1206 0 OHM, 1%", LatestRevisionDate=17-Jul-2002, LatestRevisionNote="Re-released for DXP Platform.", PackageDescription="Axial Device, Thru-Hole; 2 Leads; 0.3 in Pin Spacing", PackageReference=AXIAL-0.3, Published=8-Jun-2000, Publisher="Altium Limited", tipo=resistencia, valor="0 OHM"
RL1: "Omrom Relay G5V-2-5VDC", Sallen Ref=05032015
U1: library part 6004008, Codigo=6004008, DescripcionArticulo="TRANSISTOR SMD MC78M05CDTRK", Escandallo=Sí
U2: library part 4021038, Codigo=4021038, DescripcionArticulo="MICRO STM32F072CBT7 LQFP48", Escandallo=Sí, tipo=integrado, valor=STM32F072CBT7
U3: library part 4007001, "Convertidor DC/DC isolated 1W 5v/5v 1.8E DANUBE (eQ XpPower IE0505S)", Part Number=-, Codigo=4007001, DescripcionArticulo="CONVERTIDOR DC/DC 1W 5V/12V 1.8 MUS-0512", Escandallo=Sí, Sallen Ref=04007002, tipo=integrado, valor=MUS-0505
U4: library part 6001176, "CAN Transceiver Isolated 3-5vcc (-55º-105ºC)SOP8-DIP", Part Number=-, Codigo=6001176, DescripcionArticulo="CAN TRANSCEIVER ISO1050DU SOP8-DIP", Escandallo=Sí, Sallen Ref=06001176, tipo=integrado, valor=ISO1050DU
U7: library part 6001091, Codigo=6001091, DescripcionArticulo="CIRCUITO INTEGRADO SMD MAX3232CSE", Escandallo=Sí, tipo=integrado, valor=MAX3232
U8: library part 6001076, Codigo=6001076, DescripcionArticulo="CIRCUITO INTEGRADO SMD M24C16 WMN6TP SOIC8P", Escandallo=Sí, valor=M24C16
U9: library part 6001170, "Buck Step Down Regulator with 3.5 to 42 V Input and 0.8 to 39 V Output, -40 to 150 degC, 10-Pin MSOP-PowerPAD (DGQ), Green (RoHS & no Sb/Br)", Manufacturer="Texas Instruments", Rating=Catalog, Switch Current Limit(Typ)(A)=0.94, Code_JEDEC=MO-187-BA-T, Codigo=6001170, ComponentLink1Description=Datasheet, ComponentLink1URL=http://www.ti.com/general/docs/lit/getliterature.tsp?genericPartNumber=TPS5401&fileType=pdf, ComponentLink2Description="Package Specification", ComponentLink2URL=http://www.ti.com/lit/ml/mpds043e/mpds043e.pdf, ComponentLink3Description="URL Link1", ComponentLink3URL="Samples URL:http://www.ti.com/product/tps5401#samples", DatasheetVersion=SLVSAB0, DescripcionArticulo="IC ROHS SMD TPS5401DGQ", Duty Cycle(Max)(%)=98, Eco-Plan="Green (RoHS & no Sb/Br)", Escandallo=Sí, Iout(Max)(A)=0.5, Iq(Typ)(mA)=0.116, Mounting Technology="Surface Mount", PackageDescription="10-Pin PowerPAD Plastic Small Outline 0.5 mm Pitch, Exposed Pad", PackageReference=DGQ0010D, PackageVersion="revF, Nov-2011", PartNumber=TPS5401DGQ, Regulated Outputs(#)=1, SubFamily="Step-Down Regulator", tipo=integrado, Topology=Buck, valor=TPS5401DGQ, Vin(Max)(V)=42, Vin(Min)(V)=3.5, Vout(Max)(V)=39, Vout(Min)(V)=0.8
U10: library part 6001155, "800mA Low-Dropout Linear Regulator, 4-pin SOT-223, Pb-Free", Manufacturer="National Semiconductor", PackageTopMarking=XYTT*N05B, PowerWise=N, Code_IPC=SOT223-4, Code_JEDEC=TO-261-AA, Codigo=6001155, ComponentLink1Description="Manufacturer URL", ComponentLink1URL=http://www.national.com/, ComponentLink2Description="LM1117 Datasheet", ComponentLink2URL=http://www.national.com/ds/LM/LM1117.pdf, ComponentLink3Description="LM1117 Web Page", ComponentLink3URL=http://www.national.com/pf/LM/LM1117.html, ComponentLink4Description="MP04A Package Page", ComponentLink4URL=http://www.national.com/packaging/folders/mp04a.html, CompType="LDO IC", DatasheetVersion=Apr-2006, Descripcion2Articulo="Case Style:SOT-223", DescripcionArticulo="IC SMD  LM1117IMP-3.3/NOPB - V REG, LINEAR, 3.3V", Escandallo=Sí, High-Reliability=Y, PackageDescription="Molded SOT-223, 6.50 x 3.56 x 1.6mm Body, 4 Lead, 2.3mm Pitch", PackageReference=MP04A, PackageVersion="revB, Apr-2003", PartNumber=LM1117IMPX-3.3/NOPB, PinCount=4, RevisionNote="SCH symbol layout adjusted", RoHS=Y, tipo=integrado, valor=LM1117IMPX-3.3/NOPB
V1 V2 V3 V4: "Varistor (Voltage-Sensitive Resistor)"
X1: library part OSC7X5_4P3.3-24MHZ, "Oscillator 7x5mm 24Mhz 3.3v 4p s73305T-24 //Aker-usa", Part Number=-, Codigo=04027021, Part Type=Oscillator, Sallen Ref=04027021
Y1: "Crystal Oscillator", LatestRevisionDate=17-Jul-2002, LatestRevisionNote="Re-released for DXP Platform.", PackageDescription="Crystal, Thru-Hole; 2 Leads; Body 3.1 x 8.2 mm (Dia.xH)", PackageReference=R38, Published=8-Jun-2000, Publisher="Altium Limited"

## Nets (pads, with @x,y where several pads share a name; then routed paths per layer and width w, separated by ;. In a path a pad name is that pad's centre, name@x,y a point inside that pad or via, vN(x,y) a via of type N, cw(c..) or ccw(c..) an arc to the next point about the centre after c; other vN are vias at no path point)
3V3: C8.1 C12.1 C17.2 C18.2 C19.2 C20.2 C24.2 C25.2 C26.2 C27.2 C30.2 C41.2 D1.2 J5.1 P1.2 R1.2 R6.2 R7.2 R17.1 R18.2 R19.1 R21.2 R30.2 R32.1 R33.1 U2.9 U2.24 U2.36 U2.48 U4.1 U7.16 U8.8 U10.2 U10.4 X1.4
5V: C3.2 C40.2 P1.4 R31.2 U1.3 U3.2 U10.3
12V: D11.1 FB2.2
12V_F: C33.2 C34.1 FB2.1 L2.2 R24.2
+5V: D2.2 RL1.1
+5VCAN: C7.1 U3.4 U4.8
+12V: C2.2 C5.2 C31.1 D11.2 D12.2 D13.2 F2.2 U1.1
+24V: F1.2 F6.2 FB1.1
CAN_RX: U2.32 U4.2
CAN_TX: U2.33 U4.3
GND: C1.1 C2.1 C3.1 C5.1 C8.2 C9.1 C10.1 C11.1 C12.2 C14.1 C15.2 C17.1 C18.1 C19.1 C20.1 C23.2 C24.1 C25.1 C26.1 C27.1 C30.1 C31.2 C33.1 C34.2 C35.1 C36.1 C37.1 C38.1 C39.1 C40.1 C41.1 D1.1 D7.1 D8.2 D9.2 D10.2 EC3.3 EC4.8 F3.1 F4.1 F7.1 J4.5 J7.3 J9.2 J10.2 P1.6 P1.14 P1.16 P2.1 P3.1 PIN1.1 Q1.S R16.1 R25.1 R28.1 R34.2 R35.1 R37.1 U1.4 U2.8 U2.23 U2.35 U2.47 U3.1 U4.4 U7.15 U8.4 U8.7 U9.9 U9.11 U10.1 V2.1 X1.2
GND_CAN: C7.2 EC1.1 EC2.1 U3.3 U4.5
GND_EARTH: J4.10 J4.11 R34.1 V2.2 V3.1 V4.1
I2C1_SCL: R32.2 U2.45 U8.6
I2C1_SDA: R33.2 U2.46 U8.5
LED_0: D3.2 U2.18
LED_1: D4.2 U2.19
LOCK_RELAY: R36.2 U2.16
LOCK_SWITCH: C1.2 D1.3 R2.1 U2.15
NetC9_2: C9.2 U2.3 Y1.2
NetC10_2: C10.2 U2.4 Y1.1
NetC13_1: C13.1 U7.3
NetC13_2: C13.2 U7.1
NetC14_2: C14.2 U7.2
NetC22_1: C22.1 U7.4
NetC22_2: C22.2 U7.5
NetC23_1: C23.1 U7.6
NetC32_1: C32.1 U9.1
NetC32_2: C32.2 D7.2 L2.1 U9.10
NetC37_2: C37.2 U9.4
NetC38_2: C38.2 R27.1
NetC39_2: C39.2 R27.2 U9.8
NetD2_1: D2.1 Q1.D RL1.16
NetD3_1: D3.1 R6.1
NetD4_1: D4.1 R7.1
NetD5_1: D5.1 R17.2
NetD6_1: D6.1 R23.1
NetD6_2: D6.2 EC3.5
NetD8_1: D8.1 R29.1
NetD9_1: D9.1 R30.1
NetD10_1: D10.1 R31.1
NetD12_1: D12.1 F4.2 F5.2
NetD13_1: D13.1 F8.2
NetEC1_2: EC1.2 EC2.2 J2.2 L1.2 R11.2 R14.2
NetEC1_3: EC1.3 EC2.3 L1.3 R9.1 R12.1 R15.2
NetEC3_1: EC3.1 R19.2
NetEC3_2: EC3.2 R18.1 R20.1
NetEC3_4: EC3.4 R21.1 R22.1
NetEC4_1: EC4.1 RL1.9
NetEC4_2: EC4.2 RL1.11
NetEC4_3: EC4.3 J8.1 R8.2
NetEC4_4: EC4.4 RL1.8
NetEC4_5: EC4.5 RL1.6
NetEC4_6: EC4.6 J3.1 R4.2
NetEC4_7: EC4.7 R1.1 R2.2
NetF1_1: F1.1 J1.2 R3.1
NetF2_1: F2.1 J6.2 R5.1
NetJ1_1: J1.1 J3.2 J6.1 R3.2 R4.1 R5.2 RL1.4 V1.1
NetJ2_1: J2.1 R10.2 R11.1 R13.2
NetJ4_2: J4.2 R39.1 V4.2
NetJ4_3: J4.3 R38.1 V3.2
NetJ5_2: J5.2 R16.2 U2.44
NetJ8_2: J8.2 J9.1 R8.1 R35.2 RL1.13 V1.2
NetL1_1: L1.1 R14.1 U4.7
NetL1_4: L1.4 R15.1 U4.6
NetQ1_G: Q1.G R36.1 R37.2
NetR9_2: R9.2 R10.1 R12.2 R13.1
NetR24_1: R24.1 R26.2
NetR25_2: R25.2 U9.5
NetR26_1: R26.1 R28.2 U9.7
NetU2_5: U2.5 X1.3
NRST: C11.2 R23.2 U2.7
PA8: P1.12 U2.29
PA15: P1.8 U2.38
PB2: P1.1 U2.20
PB3: P1.3 U2.39
PB4: P1.5 U2.40
PB5: P1.7 U2.41
PB12: P1.9 U2.25
PB13: P1.11 U2.26
PB14: P1.13 U2.27
PB15: P1.15 U2.28
PC13: P1.10 U2.2
Rx232ext: R39.2 U7.8
Rx232int: J7.1 U7.13
SDCLK: R20.2 U2.37
SDWIO: R22.2 U2.34
Tx232ext: R38.2 U7.7
Tx232int: J7.2 U7.14
USART1_RX: U2.31 U2.43 U7.9
USART1_TX: U2.30 U2.42 U7.10
USART3_RX: U2.22 U7.12
USART3_TX: U2.21 U7.11
USART4_RX: P1.18 U2.11
USART4_TX: P1.17 U2.10
VBAT: C15.1 D5.2 U2.1
VIN_ext: F5.1 J10.1
VIN_int12: F7.2 F8.1 P3.2
VIN_int24: F3.2 F6.1 P2.2
VINF: C35.2 C36.2 FB1.2 R29.2 U9.2
pads on no net: C34.PEGA D1.PEGA D2.PEGA D7.PEGA D11.PEGA D12.PEGA D13.PEGA EC3.6 J4.1 J4.4 J4.6 J4.7 J4.8 J4.9 J10.3 Q1.PEGA U2.6 U2.12 U2.13 U2.14 U2.17 U8.1 U8.2 U8.3 U9.3 U9.6 X1.1

## Text inside footprints (layer, text, board x,y; h text height)
EC1: Top Overlay "1" at 24254.17,2086.5 h39.37
EC2: Top Overlay "1" at 22869.17,2086.5 h39.37
EC3: Top Overlay "1" at 8707.68,2224.17 h39.37 r90
J4: Top Overlay "9" at 10381.75,1893.68 h39.37 r90; Top Overlay "5" at 10275.45,1946.83 h39.37 r90; Top Overlay "1" at 10275.45,1385.8 h39.37 r90; Top Overlay "6" at 10381.75,1433.05 h39.37 r90
J7: Top Overlay "1" at 12696.65,1865 h26.25 r90
P1: Top Overlay "18" at 9765,2205 h50 r90; Top Overlay "17" at 9865,2205 h50 r90; Top Overlay "1" at 9865,1225 h50 r90; Top Overlay "2" at 9765,1205 h50 r90
RL1: Drill Guide "BO" at 17917.24,1615.08 h47.24 r180; Drill Guide "NO" at 18054.29,2112.28 h39.37 r90; Drill Guide "NC" at 18054.29,1915.43 h39.37 r90; Drill Guide "NC" at 17754.29,1915.43 h39.37 r90; Drill Guide "NO" at 17754.29,2112.28 h39.37 r90; Drill Guide "CO" at 18054.29,1700.87 h39.37 r90; Drill Guide "CO" at 17755.08,1698.9 h39.37 r90
U3: Top Overlay "1" at 23368.58,1801.06 h26.25 r90